# Altium PCB module_adapters.PcbDoc
Units mm, origin at the board's own origin, x right, y up, seen from the top; angles counter-clockwise.
Board outline 100 x 50 mm, 2 copper layers (Top Layer, Bottom Layer); 44 components, 53 nets, 141 pads, 0 vias.
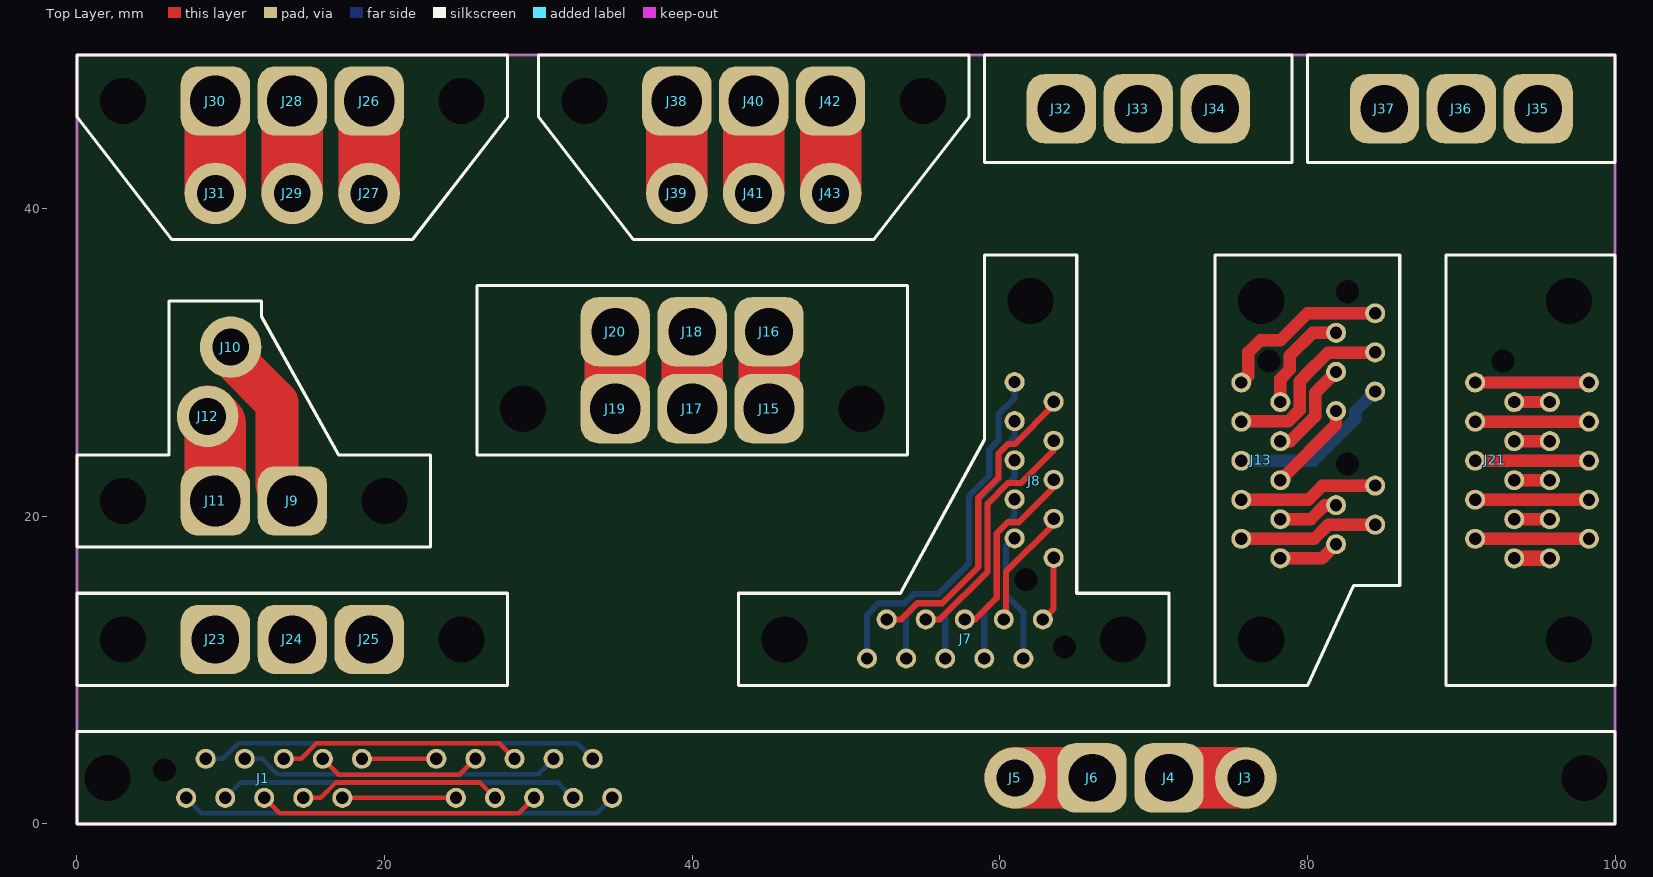
[diagram p0: Top Layer view]
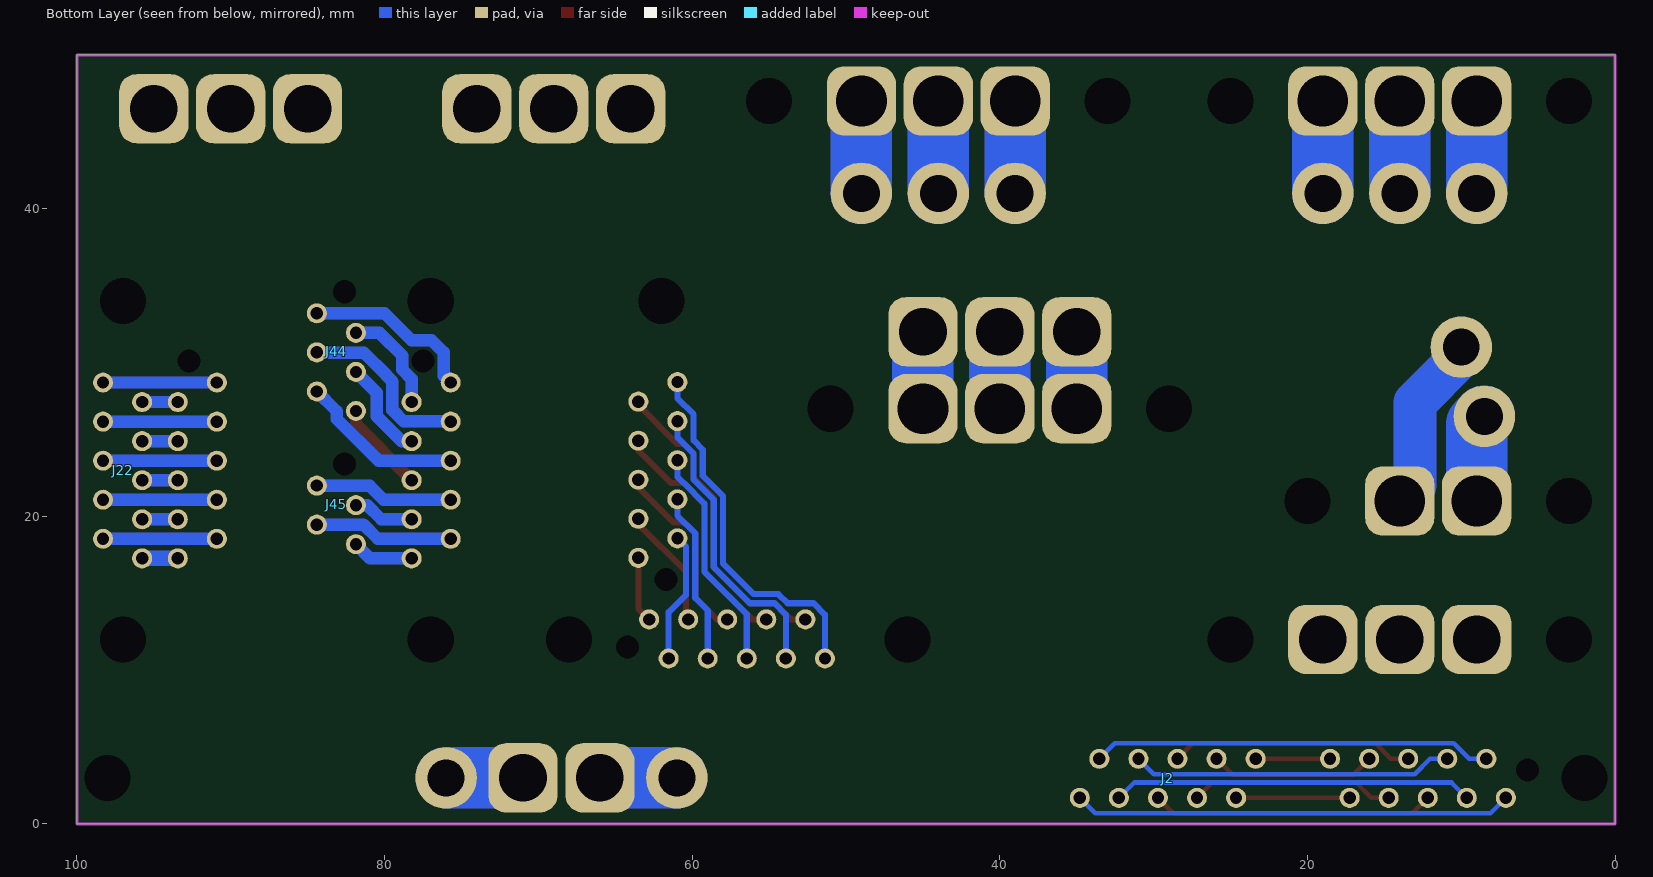
[diagram p1: Bottom Layer view, seen from below]
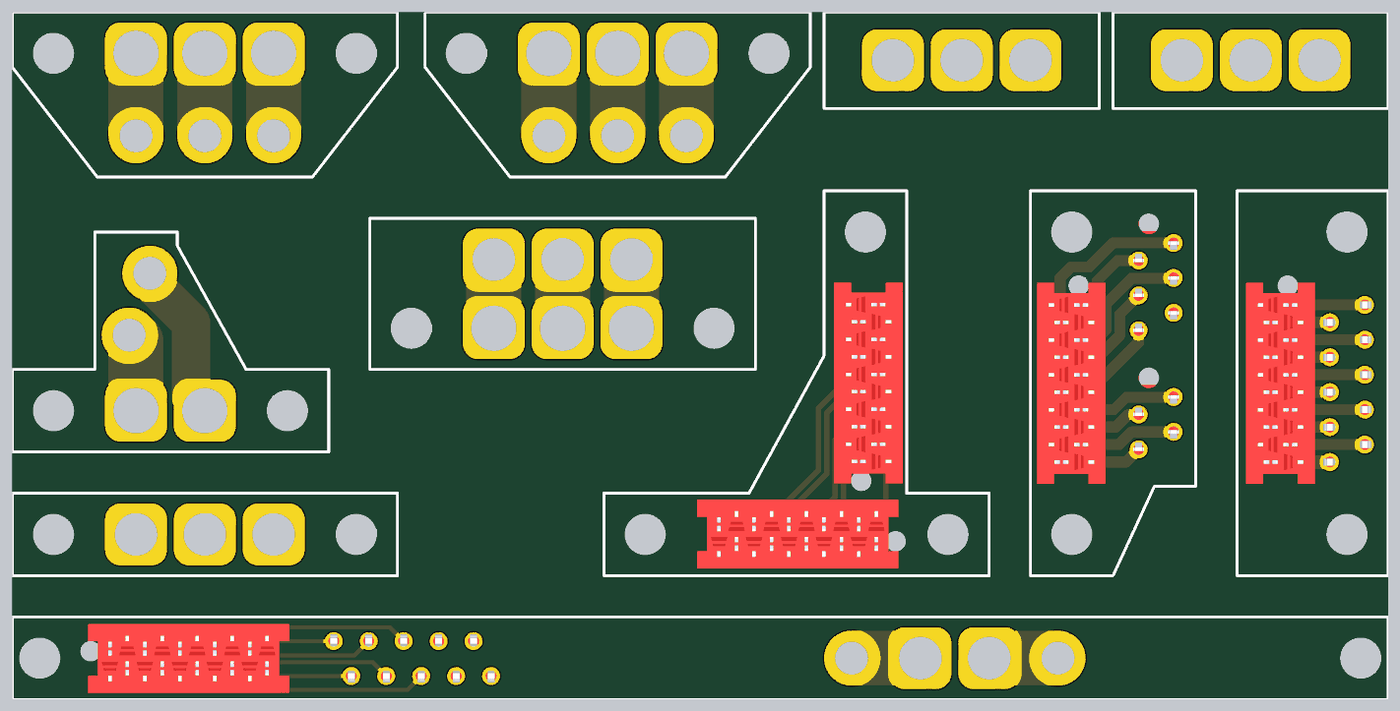
[diagram p2: 3D render of the assembled board from above, using the file's embedded part models]
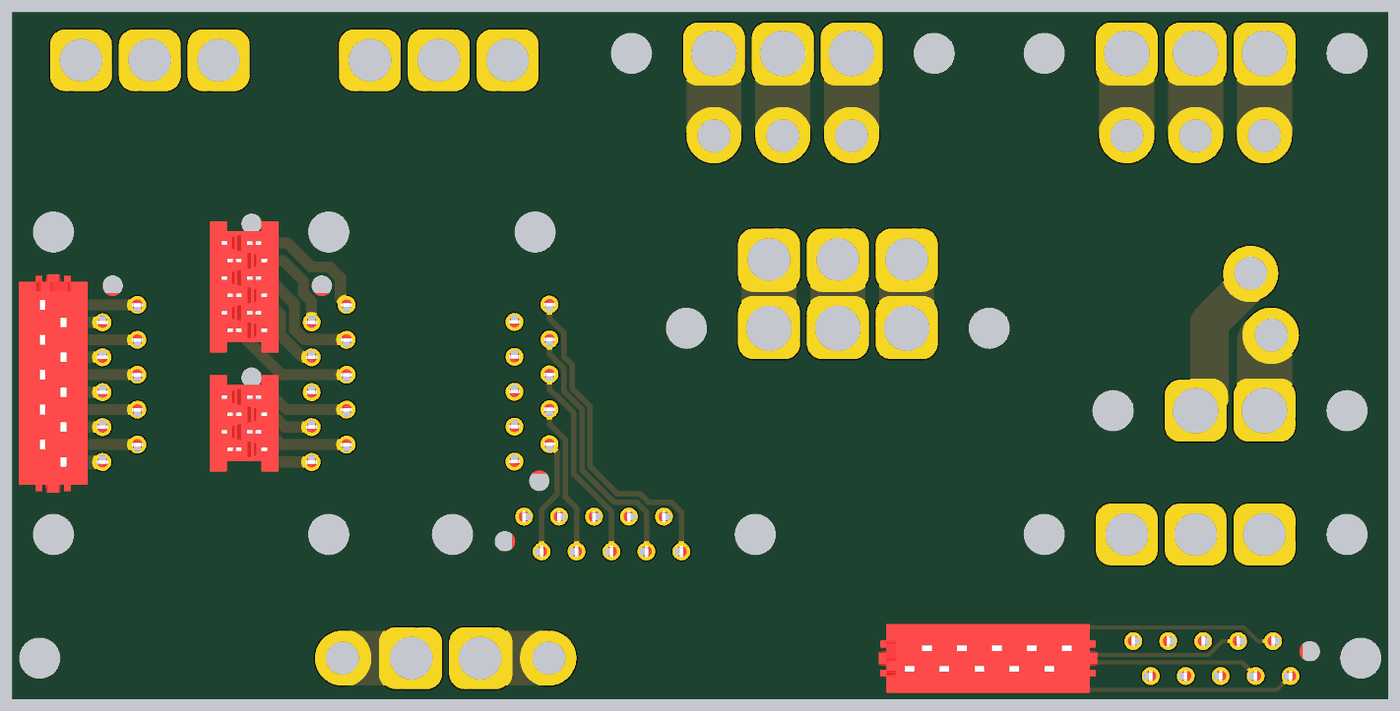
[diagram p3: 3D render of the assembled board from below, using the file's embedded part models]

## Layer stack, top to bottom
Top Solder: solder mask 0.0102, Solder Resist, Dk 3.5
Top Layer: signal copper 0.0356
Dielectric 1: dielectric 0.32, FR-4, Dk 4.8
Bottom Layer: signal copper 0.0356
Bottom Solder: solder mask 0.0102, Solder Resist, Dk 3.5

## Board outline
0,0 100,0 100,50 0,50

## Design rules (kind name [scope] priority, off if disabled: settings)
Clearance [All] p1: gap=0.2
ComponentClearance [All] p1: gap=0.2 collisioncheckmode=3 verticalgap=0.2 showdistances=FALSE
PolygonConnect [All] p1: connectstyle=Relief reliefconductorwidth=0.254 reliefentries=4 polygonreliefangle="90 Angle" airgapwidth=0.254
RoomDefinition module_adapters [InComponentClass('module_adapters')] p1: confinementstyle=ConfineIn formatcopy=TRUE lockcomponents=FALSE outline 0,0.16 100,0.16 100,50 0,50
RoutingVias [All] p1: holewidth=0.5 width=1 viastyle="Through Hole" minholewidth=0.3 minwidth=0.6 maxholewidth=5 maxwidth=10
SolderMaskExpansion [All] p1: expansion=0.1
Width [All] p1: maxlimit=10 minlimit=0.2 preferedwidth=0.5 minimp=50.000000 maximp=50.000000 favimp=50.000000
29 further rules are at their usual default settings.

## Components (designator, comment, footprint, x,y, rotation, side; value= is the part's Value field where it differs from the comment)
J1 "COIL_IN" MICRO-MATCH-10 7.1,1.7 r180 top
J2 "COIL_OUT" MICRO-MATCH-MOB-10 34.8,1.7 r180 bottom
J3 "PWR_IN+" HIGH-POWER-VIA 76,3 r0 top
J4 "PWR_OUT+" 2MM-BANANA-VIA 71,3 r0 top
J5 "PWR_IN-" HIGH-POWER-VIA 61,3 r0 top
J6 "PWR_OUT-" 2MM-BANANA-VIA 66,3 r0 top
J7 "HEADER-10" MICRO-MATCH-10 62.8,13.3 r0 top
J8 "HEADER-10" MICRO-MATCH-10 63.5,17.3 r270 top
J9 "HEADER-1" 2MM-BULLET-PLUG-VIA 14,21 r0 top
J10 "HEADER-1" HIGH-POWER-VIA 10,31 r0 top
J11 "HEADER-1" 2MM-BULLET-PLUG-VIA 9,21 r0 top
J12 "HEADER-1" HIGH-POWER-VIA 8.5,26.5 r0 top
J13 "HEADER-10" MICRO-MATCH-10 75.7,28.7 r90 top
J15 "HEADER-1" 2MM-BULLET-PLUG-VIA 45,27 r270 top
J16 "HEADER-1" 2MM-BANANA-VIA 45,32 r270 top
J17 "HEADER-1" 2MM-BULLET-PLUG-VIA 40,27 r270 top
J18 "HEADER-1" 2MM-BANANA-VIA 40,32 r270 top
J19 "HEADER-1" 2MM-BULLET-PLUG-VIA 35,27 r270 top
J20 "HEADER-1" 2MM-BANANA-VIA 35,32 r270 top
J21 "HEADER-10" MICRO-MATCH-10 90.9,28.7 r90 top
J22 "HEADER-10" MICRO-MATCH-MOB-10 98.3,28.7 r270 bottom
J23 "HEADER-1" 2MM-BANANA-VIA 9,12 r90 top
J24 "HEADER-1" 2MM-BANANA-VIA 14,12 r90 top
J25 "HEADER-1" 2MM-BANANA-VIA 19,12 r90 top
J26 "HEADER-1" 2MM-BULLET-PLUG-VIA 19,47 r180 top
J27 "HEADER-1" HIGH-POWER-VIA 19,41 r180 top
J28 "HEADER-1" 2MM-BULLET-PLUG-VIA 14,47 r180 top
J29 "HEADER-1" HIGH-POWER-VIA 14,41 r180 top
J30 "HEADER-1" 2MM-BULLET-PLUG-VIA 9,47 r180 top
J31 "HEADER-1" HIGH-POWER-VIA 9,41 r180 top
J32 "HEADER-1" 2MM-BANANA-VIA 64,46.5 r0 top
J33 "HEADER-1" 2MM-BANANA-VIA 69,46.5 r0 top
J34 "HEADER-1" 2MM-BANANA-VIA 74,46.5 r0 top
J35 "HEADER-1" 2MM-BANANA-VIA 95,46.5 r180 top
J36 "HEADER-1" 2MM-BANANA-VIA 90,46.5 r180 top
J37 "HEADER-1" 2MM-BANANA-VIA 85,46.5 r180 top
J38 "HEADER-1" 2MM-BULLET-PLUG-VIA 39,47 r90 top
J39 "HEADER-1" HIGH-POWER-VIA 39,41 r90 top
J40 "HEADER-1" 2MM-BULLET-PLUG-VIA 44,47 r90 top
J41 "HEADER-1" HIGH-POWER-VIA 44,41 r90 top
J42 "HEADER-1" 2MM-BULLET-PLUG-VIA 49,47 r90 top
J43 "HEADER-1" HIGH-POWER-VIA 49,41 r90 top
J44 "HEADER-6" MICRO-MATCH-6 84.4,33.2 r90 bottom
J45 "HEADER-4" MICRO-MATCH-4 84.4,22 r90 bottom

## Footprints (in the part's own frame and the unit in brackets; to place one, negate y for a bottom-side part, rotate by r counter-clockwise, add the part's x,y. Pads: shape width x height; smd on the part's side, far side on the other; paste and mask are expansions set on the pad)
2MM-BANANA-VIA [mm]
  rrect50% 4.5x4.5 hole 3.1: 1(0,0)
2MM-BULLET-PLUG-VIA [mm]
  rrect50% 4.5x4.5 hole 3.3: 1(0,0)
HIGH-POWER-VIA [mm]
  round 4 hole 2.4: 1(0,0)
MICRO-MATCH-4 [mm]
  round 1.3 hole 0.8: 1(0,0) 2(-1.27,-2.54) 3(-2.54,0) 4(-3.81,-2.54)
  round 0 hole 1.5 unplated: drill(1.4,-1.8)
  body extent -5.41,-3.77 1.6,1.23, height 4
MICRO-MATCH-6 [mm]
  round 1.3 hole 0.8: 1(0,0) 2(-1.27,-2.54) 3(-2.54,0) 4(-3.81,-2.54) 5(-5.08,0) 6(-6.35,-2.54)
  round 0 hole 1.5 unplated: drill(1.4,-1.8)
  body extent -7.95,-3.77 1.6,1.23, height 4
MICRO-MATCH-10 [mm]
  round 1.3 hole 0.8: 1(0,0) 2(-1.27,-2.54) 3(-2.54,0) 4(-3.81,-2.54) 5(-5.08,0) 6(-6.35,-2.54) 7(-7.62,0) 8(-8.89,-2.54) 9(-10.16,0) 10(-11.43,-2.54)
  round 0 hole 1.5 unplated: drill(1.4,-1.8)
  body extent -13.03,-3.77 1.6,1.23, height 4
MICRO-MATCH-MOB-10 [mm]
  round 1.3 hole 0.8: 1(0,0) 2(1.27,2.54) 3(2.54,0) 4(3.81,2.54) 5(5.08,0) 6(6.35,2.54) 7(7.62,0) 8(8.89,2.54)
  round 1.3 hole 0.8 unplated: 9(10.16,0) 10(11.43,2.54)
  body extent -2.22,-1.23 13.66,3.77, height 6.9

## Part data
J1 J2: library part HEADER-10
J3 J4 J5 J6: library part HEADER-1

## Free pads (board coordinates)
  round 0 hole 3 unplated: 0(2,3) 0(3,21) 0(3,12) 0(3,47) 0(20,21) 0(25,12) 0(25,47) 0(29,27) 0(33,47) 0(46,12) 0(51,27) 0(55,47) 0(62,34) 0(68,12) 0(77,12) 0(77,34) 0(97,12) 0(97,34) 0(98,3)

## Nets (pads, with @x,y where several pads share a name; then routed paths per layer and width w, separated by ;. In a path a pad name is that pad's centre, name@x,y a point inside that pad or via, vN(x,y) a via of type N, cw(c..) or ccw(c..) an arc to the next point about the centre after c; other vN are vias at no path point)
NetJ1_1: J1.1 J2.1 | length 28.5
  Bottom Layer w0.3: J1.1 8.1,0.7 33.8,0.7 J2.1
NetJ1_2: J1.2 J2.2 | length 26
  Bottom Layer w0.3: J1.2 9.496,4.24 10.496,5.24 32.53,5.24 J2.2
NetJ1_3: J1.3 J2.3 | length 23.4
  Bottom Layer w0.3: J1.3 10.64,2.7 31.26,2.7 J2.3
NetJ1_4: J1.4 J2.4 | length 20.9
  Bottom Layer w0.3: J1.4 12.036,4.24 13.036,3.24 29.99,3.24 J2.4
NetJ1_5: J1.5 J2.5 | length 18.4
  Top Layer w0.3: J1.5 13.18,0.7 28.72,0.7 J2.5
NetJ1_6: J1.6 J2.6 | length 15.8
  Top Layer w0.3: J1.6 14.576,4.24 15.576,5.24 27.45,5.24 J2.6
NetJ1_7: J1.7 J2.7 | length 13.3
  Top Layer w0.3: J1.7 15.846,1.7 16.846,2.7 26.18,2.7 J2.7
NetJ1_8: J1.8 J2.8 | length 10.8
  Top Layer w0.3: J1.8 17.03,3.2 24.87,3.2 J2.8
NetJ1_9: J1.9 J2.9 | length 7.4
  Top Layer w0.3: J1.9 J2.9
NetJ1_10: J1.10 J2.10 | length 4.8
  Top Layer w0.3: J1.10 J2.10
NetJ3_1: J3.1 J4.1 | length 10
  Top Layer w4: J4.1 J3.1
  Bottom Layer w4: J4.1 J3.1
NetJ5_1: J5.1 J6.1 | length 10
  Top Layer w4: J5.1 J6.1
  Bottom Layer w4: J5.1 J6.1
NetJ7_1: J7.1 J8.1 | length 4.3
  Top Layer w0.4: J7.1 63.5,14 J8.1
NetJ7_2: J7.2 J8.2 | length 8.5
  Bottom Layer w0.4: J8.2 60.4,18.01 60.4,14.9 61.53,13.77 J7.2
NetJ7_3: J7.3 J8.3 | length 7.9
  Top Layer w0.4: J7.3@60.16,13.3 60.4,13.54 60.4,16.4 63.5,19.5 J8.3
NetJ7_4: J7.4 J8.4 | length 11.2
  Bottom Layer w0.4: J7.4 58.99,13.89 59.8,14.7 59.8,18.895 60.96,20.055 J8.4
NetJ7_5: J7.5 J8.5 | length 12.3
  Top Layer w0.4: J7.5 58.4,13.3 59.8,14.7 59.8,18.895 60.525,19.62 61.22,19.62 63.5,21.9 J8.5
NetJ7_6: J7.6 J8.6 | length 14.8
  Bottom Layer w0.4: J7.6 56.45,13.65 59.2,16.4 59.2,20.835 60.525,22.16 60.56,22.16 60.96,22.56 J8.6
NetJ7_7: J7.7 J8.7 | length 16.1
  Top Layer w0.4: J7.7 56.1,13.3 59.2,16.4 59.2,20.835 60.525,22.16 61.36,22.16 63.5,24.3 J8.7
NetJ7_8: J7.8 J8.8 | length 19.3
  Bottom Layer w0.4: J7.8 53.91,13.615 54.645,14.35 56.25,14.35 58.6,16.7 58.6,21.083 59.91,22.393 59.91,24.085 60.96,25.135 J8.8
NetJ7_9: J7.9 J8.9 | length 20.4
  Top Layer w0.4: J7.9 53.595,13.3 54.645,14.35 56.25,14.35 58.6,16.7 58.6,21.2 59.91,22.51 59.91,24.085 60.525,24.7 60.955,24.7 63.5,27.245 J8.9
NetJ7_10: J7.10 J8.10 | length 23.9
  Bottom Layer w0.4: J7.10 51.37,13.615 52.105,14.35 53.797,14.35 54.397,14.95 56.001,14.95 58,16.949 58,21.332 59.31,22.642 59.31,24.333 59.91,24.933 59.91,26.625 60.96,27.675 J8.10
NetJ9_1: J9.1 J10.1 | length 23.3
  Top Layer w2.8: J10.1 10,30.4 13,27.4 13,22 J9.1
  Bottom Layer w2.8: J10.1 10,30.4 13,27.4 13,22 J9.1
NetJ11_1: J11.1 J12.1 | length 11.4
  Top Layer w4: J12.1 9,26 J11.1
  Bottom Layer w4: J12.1 9,26 J11.1
NetJ13_1: J13.1 J44.1 | length 23.1
  Top Layer w0.8: J13.1@75.7,28.9 J13.1 76.15,29.15 76.15,30.659 76.941,31.45 78.25,31.45 80,33.2 J44.1
  Bottom Layer w0.8: J13.1 76.15,29.15 76.15,30.659 76.941,31.45 78.25,31.45 80,33.2 J44.1
NetJ13_2: J13.2 J44.2 | length 13.8
  Top Layer w0.8: J13.2 78.24,28.931 78.85,29.541 78.85,30.45 80.33,31.93 J44.2
  Bottom Layer w0.8: J13.2 78.24,28.931 78.85,29.541 78.85,30.45 80.33,31.93 J44.2
NetJ13_3: J13.3 J44.3 | length 23.3
  Top Layer w0.8: J13.3 75.72,26.18 78.758,26.18 79.49,26.912 79.49,28.767 79.85,29.127 79.85,29.148 81.342,30.64 84.38,30.64 J44.3
  Bottom Layer w0.8: J13.3 75.72,26.18 78.758,26.18 79.49,26.912 79.49,28.767 79.85,29.127 79.85,29.148 81.342,30.64 84.38,30.64 J44.3
NetJ13_4: J13.4 J44.4 | length 12.8
  Top Layer w0.8: J13.4 78.882,24.89 80.5,26.508 80.5,28.03 J44.4
  Bottom Layer w0.8: J13.4 78.89,24.89 80.5,26.5 80.5,28.03 J44.4
NetJ13_5: J13.5 J44.5 | length 10.9
  Bottom Layer w0.8: J13.5 80.398,23.62 83.11,26.332 83.11,26.83 J44.5
NetJ13_6: J13.6 J44.6 | length 6
  Top Layer w0.8: J13.6 81.86,25.97 J44.6
NetJ13_7: J13.7 J45.1 | length 18.2
  Top Layer w0.8: J13.7 80.066,21.08 80.966,21.98 84.38,21.98 J45.1
  Bottom Layer w0.8: J13.7 80.066,21.08 80.966,21.98 84.38,21.98 J45.1
NetJ13_8: J13.8 J45.2 | length 8
  Top Layer w0.8: J13.8 80.21,19.81 81.13,20.73 J45.2
  Bottom Layer w0.8: J13.8 80.21,19.81 81.13,20.73 J45.2
NetJ13_9: J13.9 J45.3 | length 18.2
  Top Layer w0.8: J13.9 80.442,18.54 81.362,19.46 J45.3
  Bottom Layer w0.8: J13.9 80.442,18.54 81.362,19.46 J45.3
NetJ13_10: J13.10 J45.4 | length 8
  Top Layer w0.8: J13.10 80.94,17.27 J45.4
  Bottom Layer w0.8: J13.10 80.94,17.27 J45.4
NetJ15_1: J15.1 J16.1 | length 10
  Top Layer w4: J15.1 J16.1
  Bottom Layer w4: J15.1 J16.1
NetJ17_1: J17.1 J18.1 | length 10
  Top Layer w4: J17.1 J18.1
  Bottom Layer w4: J17.1 J18.1
NetJ19_1: J19.1 J20.1 | length 10
  Top Layer w4: J19.1 J20.1
  Bottom Layer w4: J19.1 J20.1
NetJ21_1: J21.1 J22.1 | length 14.8
  Top Layer w0.8: J21.1 J22.1
  Bottom Layer w0.8: J21.1 J22.1
NetJ21_2: J21.2 J22.2 | length 4.6
  Top Layer w0.8: J21.2 J22.2
  Bottom Layer w0.8: J21.2 J22.2
NetJ21_3: J21.3 J22.3 | length 14.8
  Top Layer w0.8: J21.3 J22.3
  Bottom Layer w0.8: J21.3 J22.3
NetJ21_4: J21.4 J22.4 | length 4.6
  Top Layer w0.8: J21.4 J22.4
  Bottom Layer w0.8: J21.4 J22.4
NetJ21_5: J21.5 J22.5 | length 14.8
  Top Layer w0.8: J21.5 J22.5
  Bottom Layer w0.8: J21.5 J22.5
NetJ21_6: J21.6 J22.6 | length 4.6
  Top Layer w0.8: J21.6 J22.6
  Bottom Layer w0.8: J21.6 J22.6
NetJ21_7: J21.7 J22.7 | length 14.8
  Top Layer w0.8: J21.7 J22.7
  Bottom Layer w0.8: J21.7 J22.7
NetJ21_8: J21.8 J22.8 | length 4.6
  Top Layer w0.8: J21.8 J22.8
  Bottom Layer w0.8: J21.8 J22.8
NetJ21_9: J21.9 J22.9 | length 14.8
  Top Layer w0.8: J21.9 J22.9
  Bottom Layer w0.8: J21.9 J22.9
NetJ21_10: J21.10 J22.10 | length 4.6
  Top Layer w1: J21.10 J22.10
  Bottom Layer w1: J21.10 J22.10
NetJ26_1: J26.1 J27.1 | length 12
  Top Layer w4: J27.1 J26.1
  Bottom Layer w4: J27.1 J26.1
NetJ28_1: J28.1 J29.1 | length 12
  Top Layer w4: J29.1 J28.1
  Bottom Layer w4: J29.1 J28.1
NetJ30_1: J30.1 J31.1 | length 12
  Top Layer w4: J31.1 J30.1
  Bottom Layer w4: J31.1 J30.1
NetJ38_1: J38.1 J39.1 | length 12
  Top Layer w4: J39.1 J38.1
  Bottom Layer w4: J39.1 J38.1
NetJ40_1: J40.1 J41.1 | length 12
  Top Layer w4: J41.1 J40.1
  Bottom Layer w4: J41.1 J40.1
NetJ42_1: J42.1 J43.1 | length 12
  Top Layer w4: J43.1 J42.1
  Bottom Layer w4: J43.1 J42.1
pads on no net: J1.drill J7.drill J8.drill J13.drill J21.drill J23.1 J24.1 J25.1 J32.1 J33.1 J34.1 J35.1 J36.1 J37.1 J44.drill J45.drill

## Keep-outs
Keep-Out Layer:
  the board outline again, w0.2

## Silkscreen, mask and mechanical layers (free items; w line width, h text height)
Top Overlay:
  lines w0.2: 0,0 0,6 100,6 100,0 0,0 ; 0,9 0,15 28,15 28,9 0,9 ; 0,18 23,18 23,24 17,24 12,33 12,34 6,34 6,24 0,24 0,18 ; 0,46 0,50 28,50 28,46 21.818,38 6.182,38 0,46 ; 26,24 26,35 54,35 54,24 26,24 ; 30,46 36.182,38 51.818,38 58,46 58,50 30,50 30,46 ; 43,9 43,15 53.545,15 59,25 59,37 65,37 65,15 71,15 71,9 43,9 ; 59,43 79,43 79,50 59,50 59,43 ; 74,9 74,37 86,37 86,15.5 83,15.5 80,9 74,9 ; 80,43 100,43 100,50 80,50 80,43 ; 89,9 100,9 100,37 89,37 89,9